# EAGLE board Sch pengusir hama pcb (EAGLE 9.6.0)
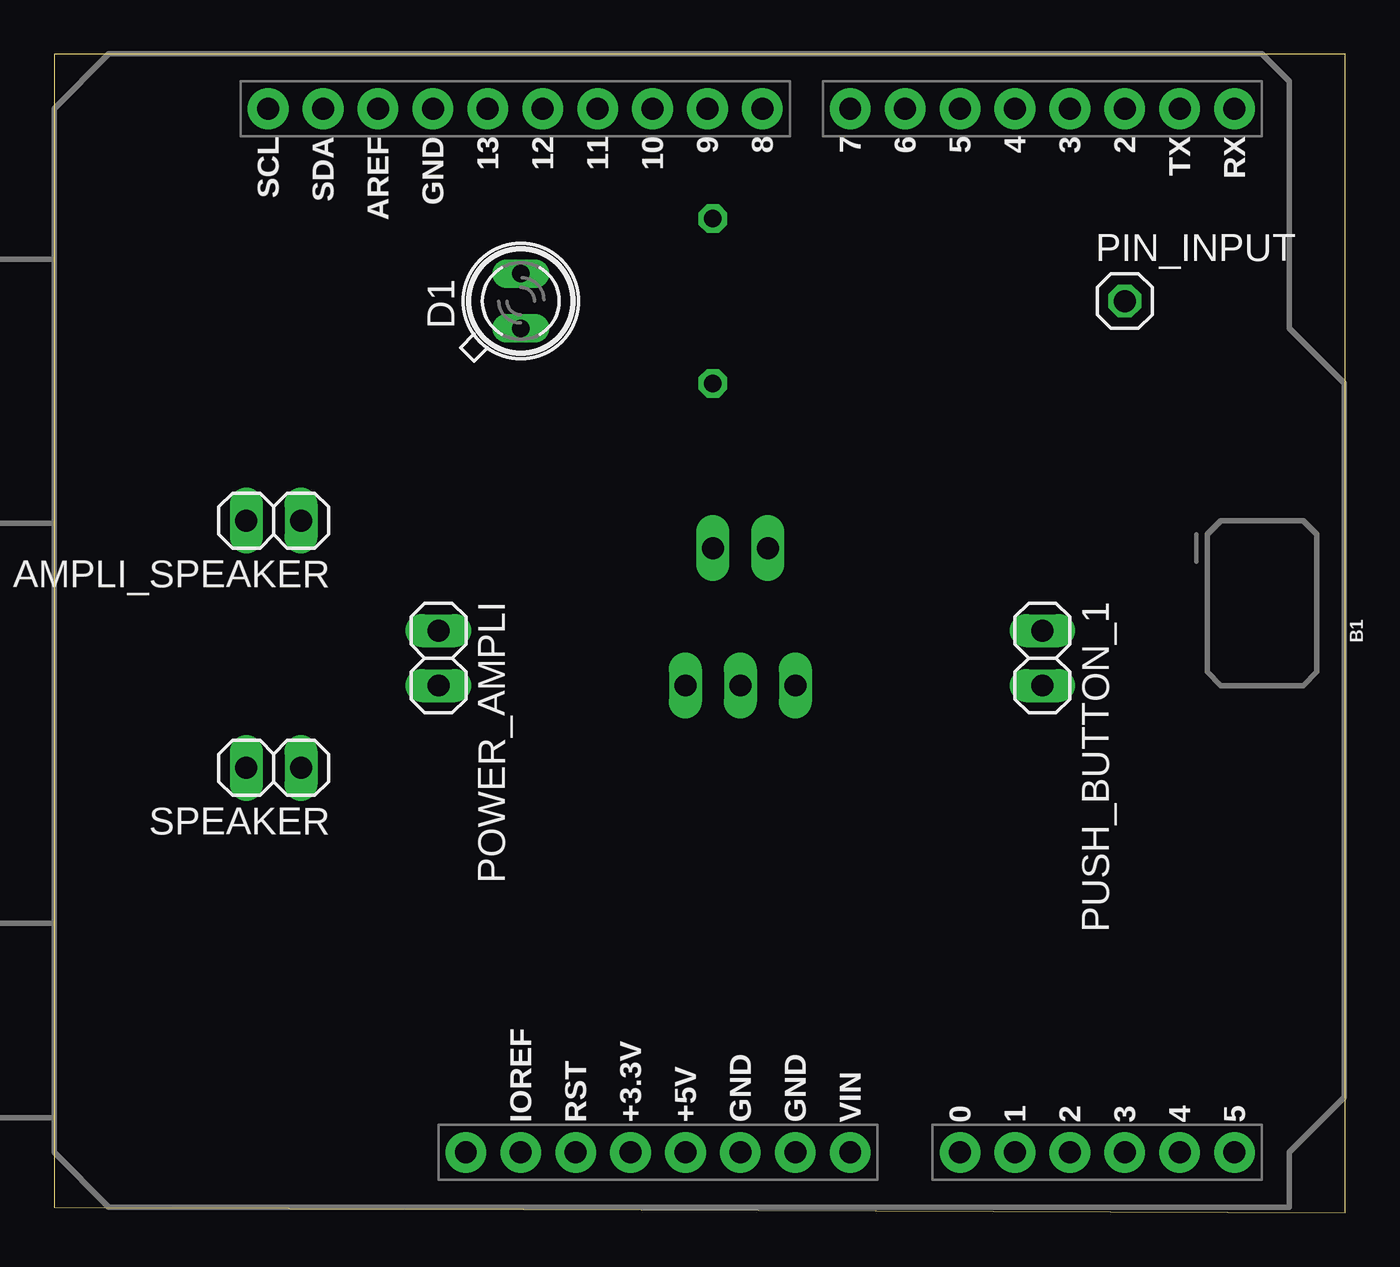
[diagram p0: board, top side]
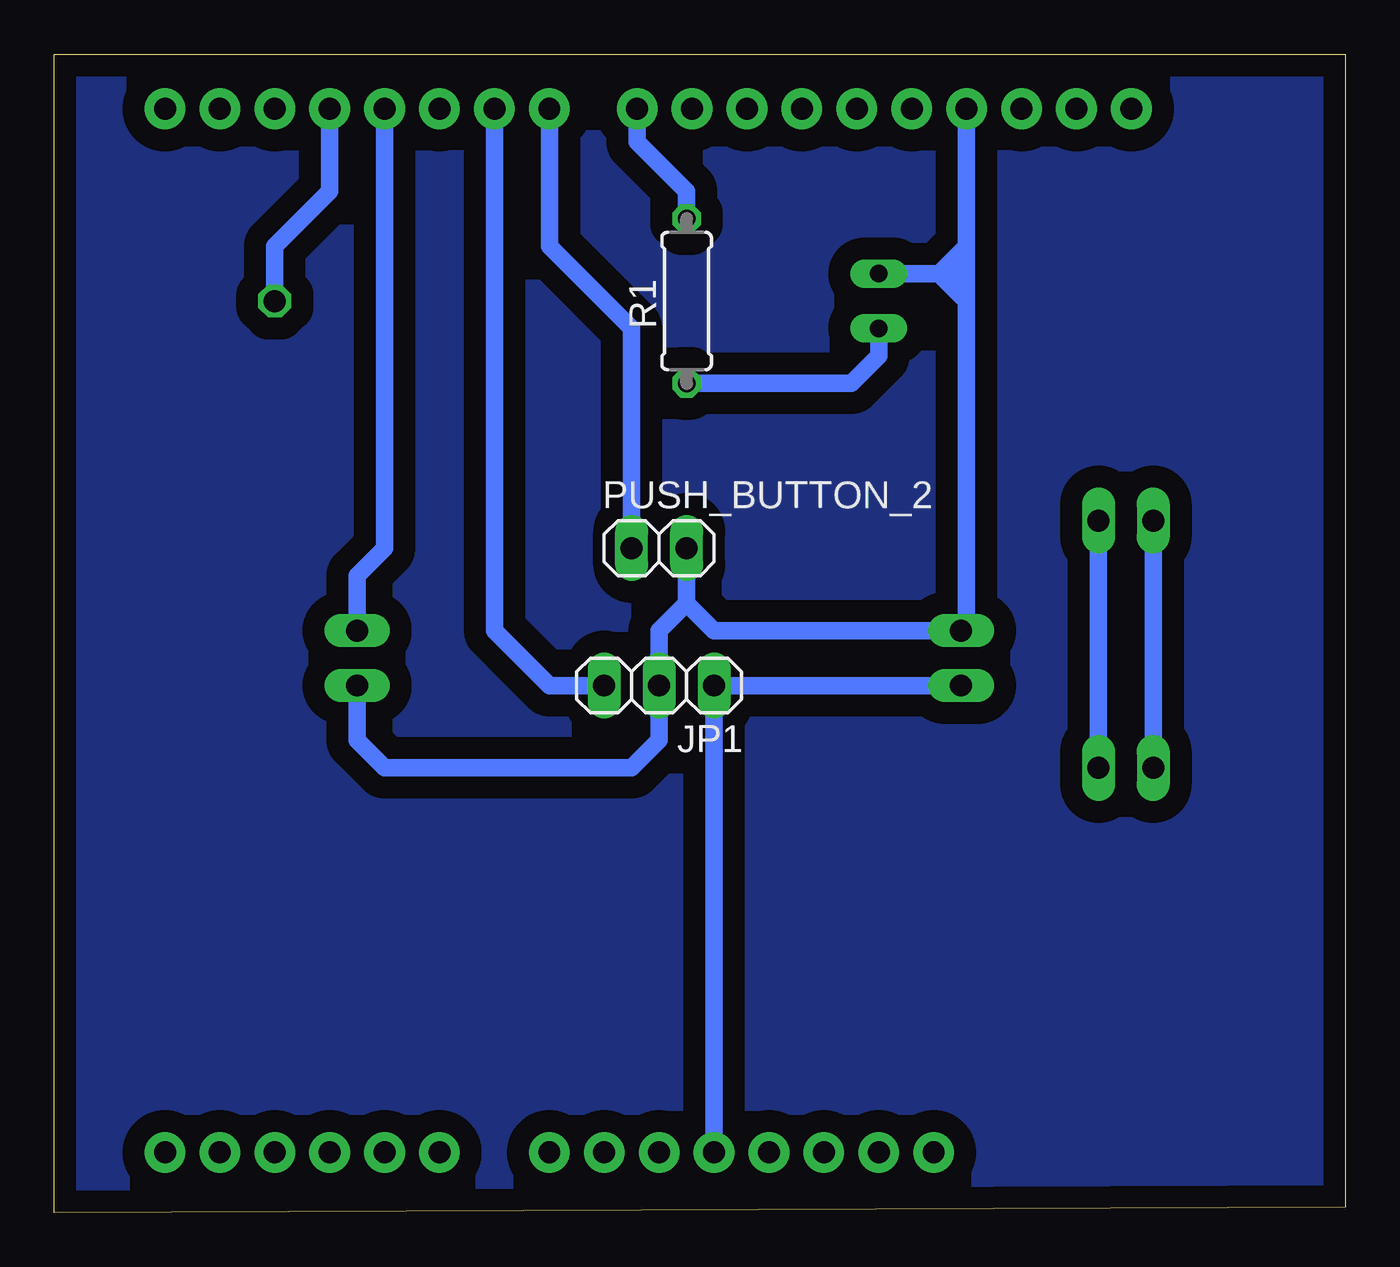
[diagram p1: board, bottom side, seen from below]

Size 59.74 x 53.58 mm. Coordinates in mm from the lower left corner, seen from the top.
Outline: 0,0.25 59.74,0 59.74,53.58 0,53.58 0,0.25
Copper layers (1*16): Top 0.035mm / dielectric 1.5mm / Bottom 0.035mm
Design rules "default": minimum track width 6mil, minimum drill 0.35mm, track to track 6mil, track to pad 6mil, pad to pad 6mil, via to via 6mil, smd to smd 6mil, copper to edge 40mil, drill to drill 6mil, minimum pad ring 10mil, minimum via ring 8mil, stop-mask expansion 4mil, vias tented up to drill 0mil, thermal gap 10mil

## Footprints (pad centres in the part's own frame; a part is rotated, then mirrored left to right if it is on the bottom)
1X02 = drill 1.016 long: 1 -1.27,0; 2 1.27,0
UNO_R3_SHIELD = drill 1.016 pad 1.88: 3.3V 24.13,-2.54; 5V 24.13,0; A0 24.13,12.7; A1 24.13,15.24; A2 24.13,17.78; A3 24.13,20.32; A4 24.13,22.86; A5 24.13,25.4; AREF -24.13,-14.224; D2 -24.13,20.32; D3 -24.13,17.78; D4 -24.13,15.24; D5 -24.13,12.7; D6 -24.13,10.16; D7 -24.13,7.62; D8 -24.13,3.556; D9 -24.13,1.016; D10 -24.13,-1.524; D11 -24.13,-4.064; D12 -24.13,-6.604; D13 -24.13,-9.144; GND@0 24.13,2.54; GND@1 24.13,5.08; GND@2 -24.13,-11.684; IOREF 24.13,-7.62; NC 24.13,-10.16; RES 24.13,-5.08; RX -24.13,25.4; SCL -24.13,-19.304; SDA -24.13,-16.764; TX -24.13,22.86; VIN 24.13,7.62
SFH482 = drill 0.813 long: A -1.27,0; K 1.27,0
1X03 = drill 1.016 long: 1 -2.54,0; 2 0,0; 3 2.54,0
1X01 = drill 1.016 octagon: 1 0,0
0207/7 = drill 0.813 octagon: 1 -3.81,0; 2 3.81,0

## Placement (x,y rotation side)
AMPLI_SPEAKER  [1X02]  10.16,32 180 top
B1  ARDUINO_UNO_R3_SHIELDBASIC  [UNO_R3_SHIELD]  29.21,26.92 270 top
D1  SFH482  [SFH482]  21.59,42.16 90 top
JP1  [1X03]  31.75,24.38 180 bottom
PIN_INPUT  [1X01]  49.53,42.16 0 top
POWER_AMPLI  [1X02]  17.78,25.65 270 top
PUSH_BUTTON_1  [1X02]  45.72,25.65 270 top
PUSH_BUTTON_2  [1X02]  31.75,30.73 0 bottom
R1  [0207/7]  30.48,42.16 90 bottom
SPEAKER  [1X02]  10.16,20.57 180 top

## Library data of the parts
AMPLI_SPEAKER JP1 PIN_INPUT POWER_AMPLI PUSH_BUTTON_1 PUSH_BUTTON_2 SPEAKER = pinhead
B1 = SparkFun-Boards
D1 = led
R1 = rcl; SPICEPREFIX: R

## Nets
3.3V: B1.3.3V
A0: B1.A0
A1: B1.A1
A2: B1.A2
A3: B1.A3
A4: B1.A4
A5: B1.A5
AREF: B1.AREF
D2: B1.D2
D3: B1.D3 PIN_INPUT.1
D4: B1.D4 PUSH_BUTTON_1.1
D5: B1.D5
D6: B1.D6 JP1.3
D7: B1.D7 PUSH_BUTTON_2.1
D8: B1.D8 R1.2
D9: B1.D9
D10: B1.D10
D11: B1.D11
D12: B1.D12
D13: B1.D13
GND: B1.GND@2 D1.K JP1.2 POWER_AMPLI.1 PUSH_BUTTON_1.2 PUSH_BUTTON_2.2
GND2: B1.GND@1
GND3: B1.GND@0
IOREF: B1.IOREF
N$1: D1.A R1.1
RES: B1.RES
RX: B1.RX
SCL: B1.SCL
SDA: B1.SDA
SPEAKER+: AMPLI_SPEAKER.1 SPEAKER.1
SPEAKER-: AMPLI_SPEAKER.2 SPEAKER.2
TX: B1.TX
VCC: B1.5V JP1.1 POWER_AMPLI.2
VIN: B1.VIN

## Tracks (layer width: path | path; a pad name or v marks a point on that pad's centre or on a via)
D3
  Bottom 0.813: B1.D3 46.99,47.24 49.53,44.7 PIN_INPUT.1
D4
  Bottom 0.813: B1.D4 44.45,30.73 45.72,29.46 PUSH_BUTTON_1.1
D6
  Bottom 0.813: B1.D6 39.37,26.92 36.83,24.38 JP1.3
D7
  Bottom 0.813: B1.D7 36.83,44.7 33.02,40.89 PUSH_BUTTON_2.1
D8
  Bottom 0.813: B1.D8 32.77,49.53 30.48,47.24 R1.2
GND
  Bottom 0.813: 17.53,44.7 B1.GND@2 17.53,47.24 | 17.53,44.7 17.53,43.43 | 17.53,43.43 17.53,42.16 | 17.53,42.16 17.53,27.18 POWER_AMPLI.1 29.21,26.92 30.48,28.19 | PUSH_BUTTON_1.2 45.72,21.84 44.45,20.57 33.02,20.57 31.75,21.84 JP1.2 31.75,26.92 30.48,28.19 | PUSH_BUTTON_2.2 30.48,28.19 | D1.K 18.8,43.43 | 18.8,43.43 17.53,43.43 | 17.53,44.7 18.8,43.43 | 18.8,43.43 17.53,42.16
N$1
  Bottom 0.813: D1.A 21.59,39.62 22.86,38.35 R1.1
N$2
  pour Bottom (isolate 1.016): 0,53.59 59.69,53.59 59.69,0.25 0,0.25
SPEAKER+
  Bottom 0.813: SPEAKER.1 AMPLI_SPEAKER.1
SPEAKER-
  Bottom 0.813: AMPLI_SPEAKER.2 SPEAKER.2
VCC
  Bottom 0.813: POWER_AMPLI.2 JP1.1 B1.5V